# Altium PCB LPFADC.PcbDoc
Units mil, origin at the board's own origin, x right, y up, seen from the top; angles counter-clockwise.
Board outline 1805 x 1165 mil, 2 copper layers (Top Layer, Bottom Layer); 15 components, 13 nets, 54 pads, 9 vias.
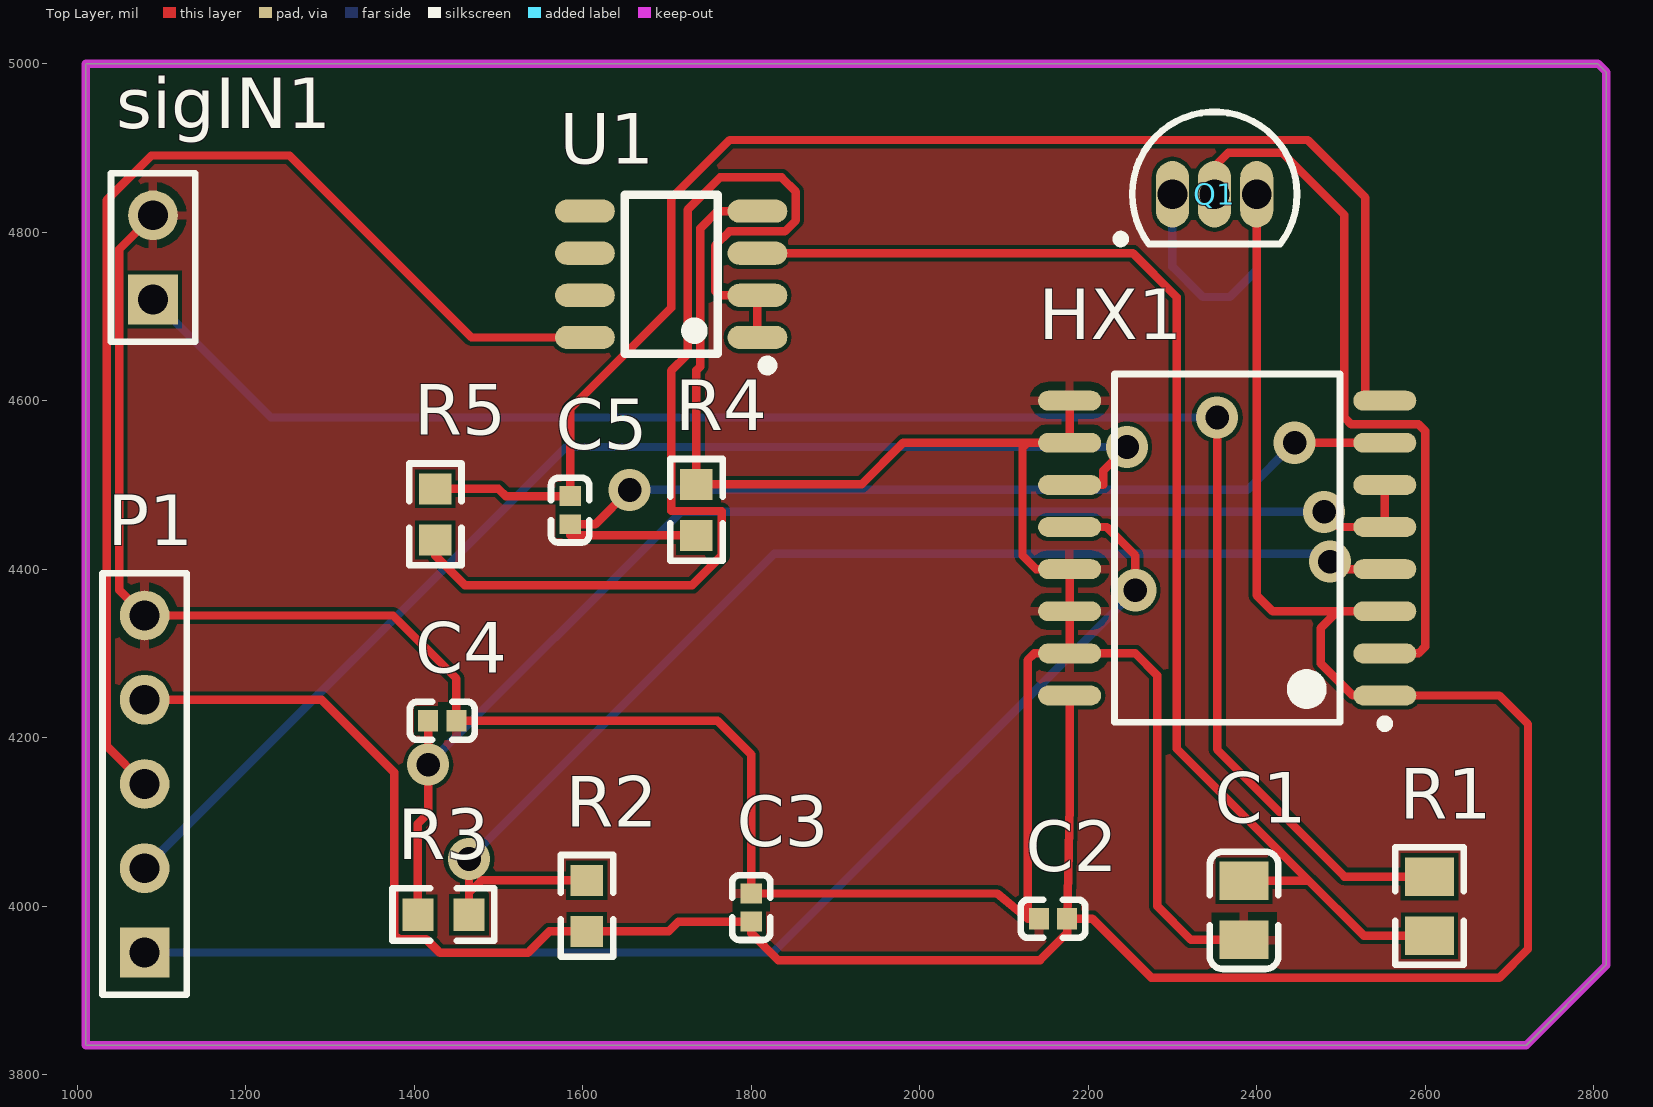
[diagram p0: Top Layer view]
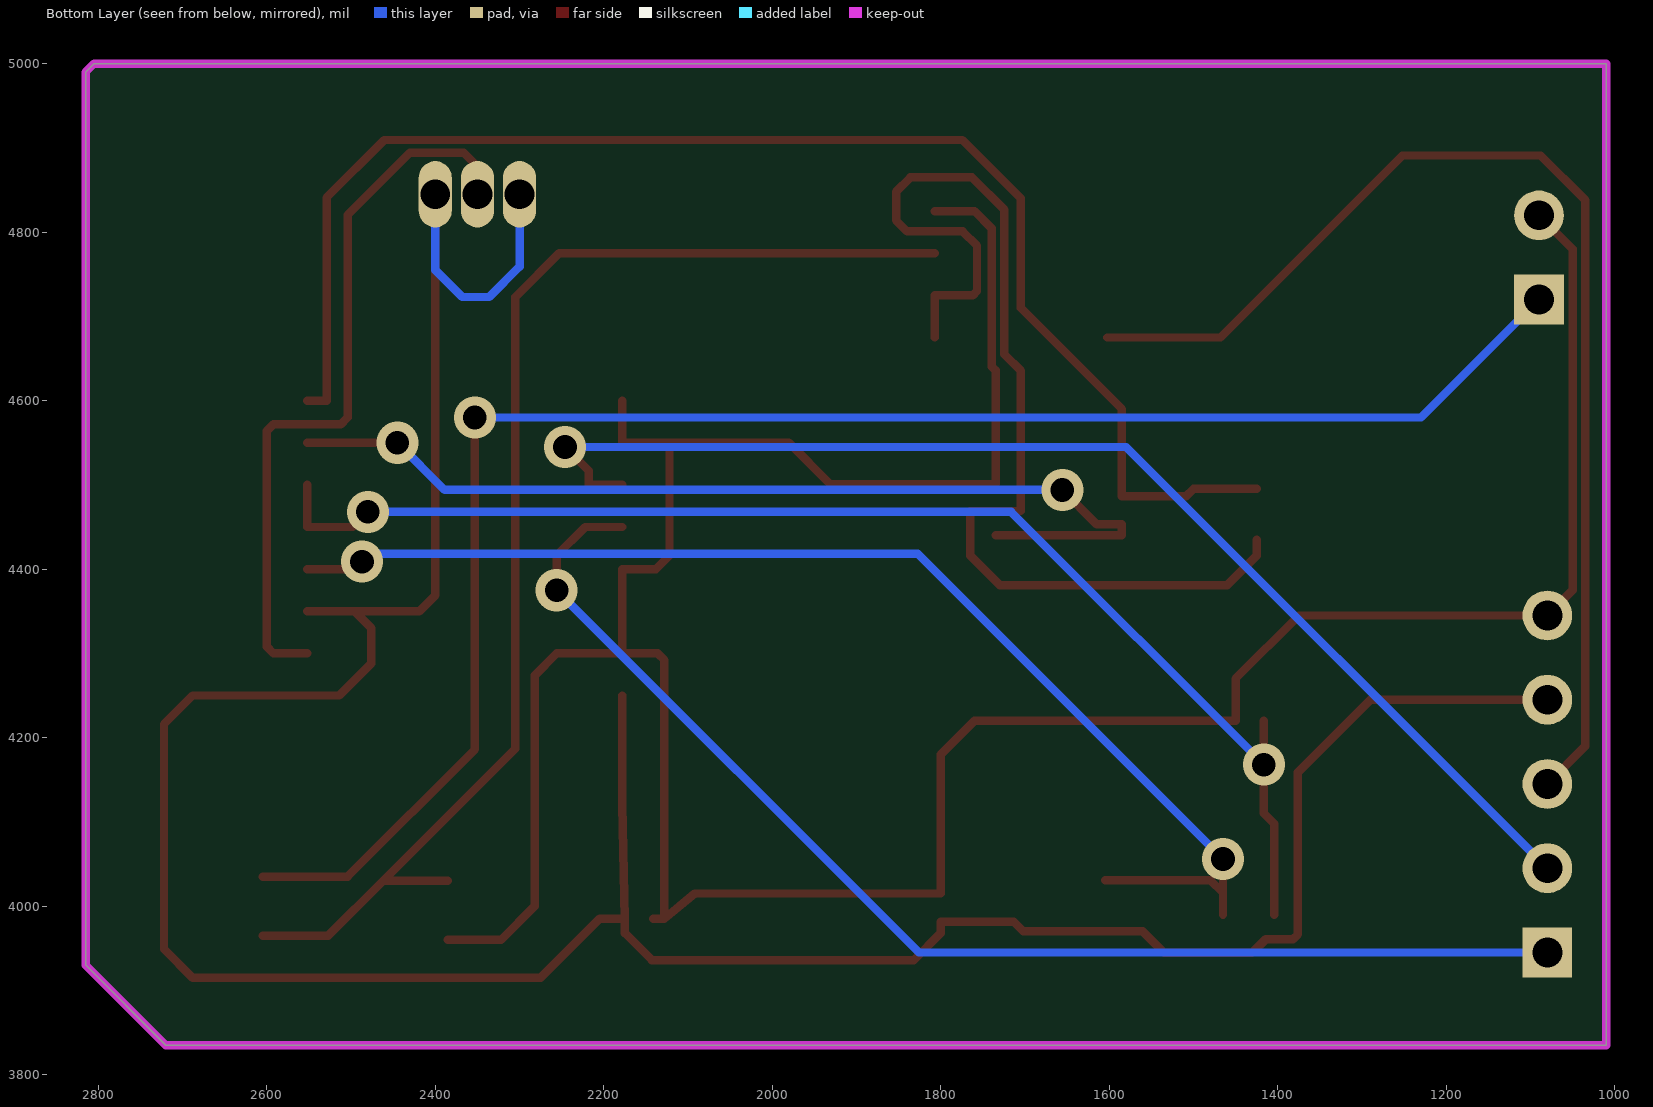
[diagram p1: Bottom Layer view, seen from below]
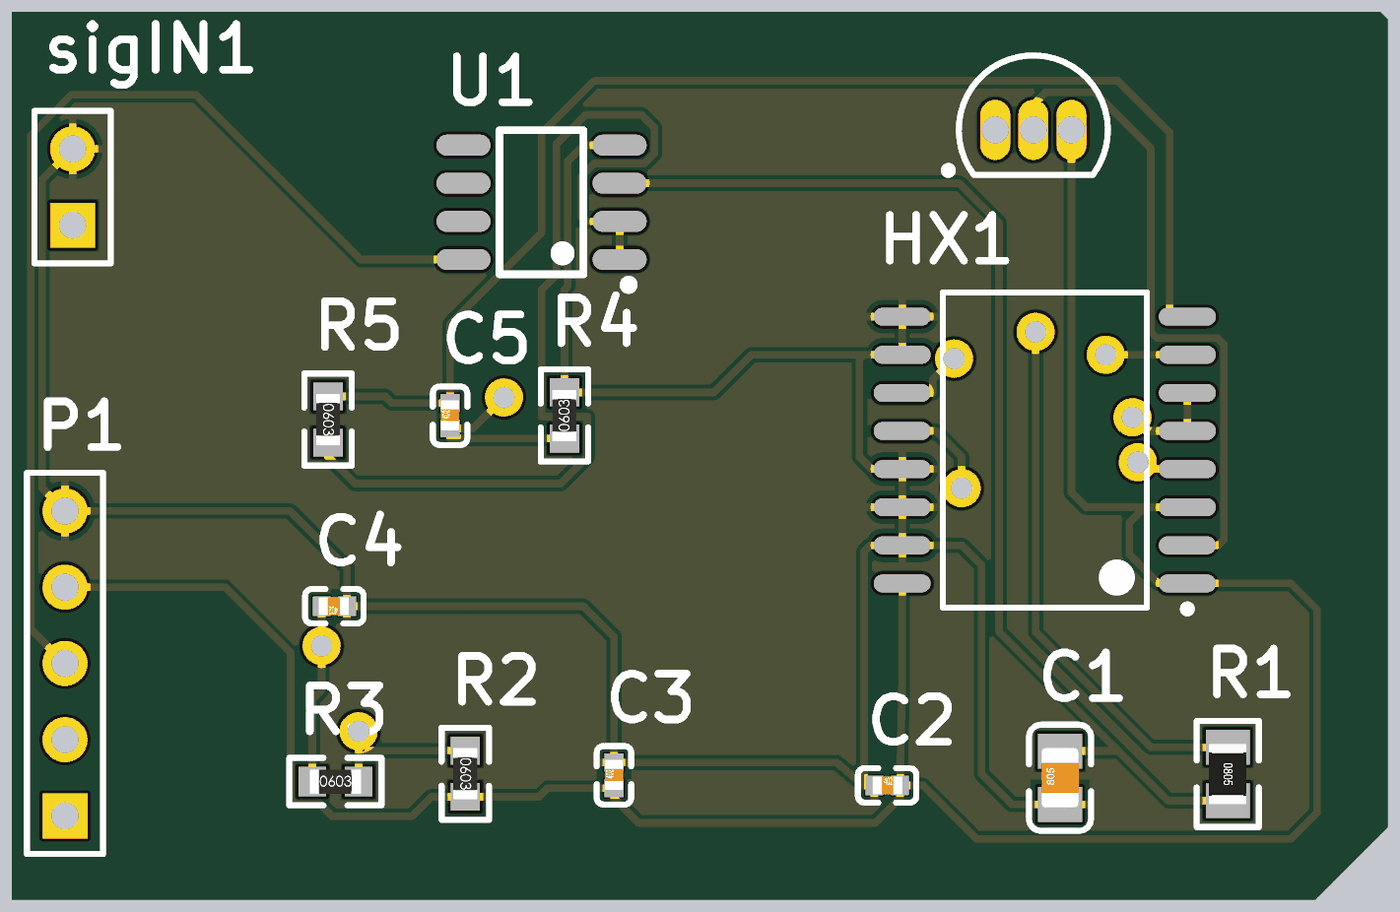
[diagram p2: 3D render of the assembled board from above, using the file's embedded part models]

## Layer stack, top to bottom
Top Solder: solder mask 0.4, Solder Resist, Dk 3.5
Top Layer: signal copper 1.4
Dielectric 1: dielectric 12.6, FR-4, Dk 4.8
Bottom Layer: signal copper 1.4
Bottom Solder: solder mask 0.4, Solder Resist, Dk 3.5

## Board outline
1010,3835 1010,5000 2805,5000 2815,4990 2815,3930 2720,3835

## Design rules (kind name [scope] priority, off if disabled: settings)
Clearance [All] p1: gap=5 ignorepadtopadclearanceinfootprint=FALSE
PolygonConnect [All] p1: connectstyle=Relief reliefconductorwidth=10 reliefentries=4 polygonreliefangle="90 Angle" airgapwidth=10
RoutingVias [All] p1: holewidth=28 width=50 viastyle="Through Hole" minholewidth=28 minwidth=50 maxholewidth=28 maxwidth=50
SolderMaskExpansion [All] p1: expansion=4
Width [All] p1: maxlimit=10 minlimit=10 preferedwidth=10
30 further rules are at their usual default settings.

## Components (designator, comment, footprint, x,y, rotation, side; value= is the part's Value field where it differs from the comment)
C1 "1uF (105) 10% 50V" 0805_C 2385,3995 r90 top
C2 "10uF (106) 20% 6.3V" 0402_C 2158.27,3985 r0 top
C3 "10uF (106) 20% 6.3V" 0402_C 1800,3998.27 r90 top
C4 "10uF (106) 20% 6.3V" 0402_C 1433.27,4220 r180 top
C5 "10uF (106) 20% 6.3V" 0402_C 1585,4470 r90 top
HX1 "hx711" HX711 2365,4425 r180 top
P1 "Header 5" HDR1X5 1080,3945 r90 top
Q1 "2N3906" TO-92A 2350,4845 r270 top
R1 "15.8k" 0805_R 2605,4000.04 r270 top
R2 "10KΩ (1002) ±1%" 0603_R 1605,4000.32 r270 top
R3 "10KΩ (1002) ±1%" 0603_R 1434.68,3990 r0 top
R4 "1KΩ (1002) ±1%" 0603_R 1735,4470.31 r90 top
R5 "1KΩ (1002) ±1%" 0603_R 1425,4465 r270 top
sigIN1 "Header 2" HDR1X2 1090,4720 r90 top
U1 "TL072CDT" SOIC-8_150mil 1705,4750 r90 top

## Footprints (in the part's own frame and the unit in brackets; to place one, negate y for a bottom-side part, rotate by r counter-clockwise, add the part's x,y. Pads: shape width x height; smd on the part's side, far side on the other; paste and mask are expansions set on the pad)
0402_C [mm]
  rect 0.6x0.65 smd mask+0.051: 1(-0.425,0) 2(0.425,0)
  silkscreen extent -0.97,-0.58 0.98,0.58, body extent -0.48,-0.3 0.52,0.3, height 0.2
0603_R [mm]
  rect 0.93x0.98 smd: 1(-0.77,0) 2(0.77,0)
  silkscreen extent -1.53,-0.79 1.54,0.79, body extent -0.85,-0.4 0.85,0.4, height 0.56
0805_C [mm]
  rect 1.16x1.47 smd: 1(-0.89,0) 2(0.89,0)
  silkscreen extent -1.77,-1.04 1.77,1.04, body extent -1,-0.62 1,0.63, height 0.77
0805_R [mm]
  rect 1.16x1.47 smd: 1(-0.89,0) 2(0.89,0)
  silkscreen extent -1.77,-1.03 1.77,1.03, body extent -1,-0.62 1,0.63, height 0.49
HDR1X2 [mm] "Connector; Header; 2 Position"
  rect 1.5x1.5 hole 0.9: 1(0,0)
  round 1.5 hole 0.9: 2(2.54,0)
  silkscreen extent -1.27,-1.27 3.81,1.27
HDR1X5 [mm] "Connector; Header; 5 Position"
  rect 1.5x1.5 hole 0.9: 1(0,0)
  round 1.5 hole 0.9: 2(2.54,0) 3(5.08,0) 4(7.62,0) 5(10.16,0)
  silkscreen extent -1.27,-1.27 11.43,1.27
HX711 [mm] "SOP, 16-Leads, Body 10.30x7.50mm, Pitch 1.27mm, IPC Medium Density"
  oval 1.9x0.6 smd: 1(-4.75,4.445) 2(-4.75,3.175) 3(-4.75,1.905) 4(-4.75,0.635) 5(-4.75,-0.635) 6(-4.75,-1.905) 7(-4.75,-3.175) 8(-4.75,-4.445) 9(4.75,-4.445) 10(4.75,-3.175) 11(4.75,-1.905) 12(4.75,-0.635) 13(4.75,0.635) 14(4.75,1.905) 15(4.75,3.175) 16(4.75,4.445)
  silkscreen extent -4.88,-5.25 3.4,5.42, body extent -3.8,-5.25 3.8,5.25, height 2.65
SOIC-8_150mil [mm]
  oval 0.7x1.8 smd: 1(-1.905,-2.6) 2(-0.635,-2.6) 3(0.635,-2.6) 4(1.905,-2.6) 5(1.905,2.6) 6(0.635,2.6) 7(-0.635,2.6) 8(-1.905,2.6)
  silkscreen extent -2.9,-3.05 2.4,1.4
TO-92A [mm] "TO, Flat Index; 3 In-Line, Axial Leads; Body Dia. 4.5mm; Leads 0.51 x 0.48 mm (max)"
  oval 2x1 hole 0.9: 1(0,-1.27) 2(0,0) 3(0,1.27)
  silkscreen extent -2.48,-2.95 1.5,2.48, body extent -2.48,-2.5 1.5,2.5, height 6.86

## Part data
C1: library part "0805 1uF (105) 10% 50V", "贴片电容", Package=0805, SuppliersPartNumber=C28323, ComponentLink1Description=供应商链接, ComponentLink1URL=http://www.szlcsc.com/product/details_29074.html, Supplier=LC
C2 C3 C4 C5: library part "0402 10uF (106) 20% 6.3V", "贴片电容", Package=0402, SuppliersPartNumber=C15525, ComponentLink1Description=供应商链接, ComponentLink1URL=http://www.szlcsc.com/product/details_16204.html, Supplier=LC
P1: "Header, 5-Pin", LatestRevisionDate=17-Jul-2002, LatestRevisionNote="Re-released for DXP Platform.", Publisher="Altium Limited"
Q1: "PNP General Purpose Amplifier", ComponentLink1Description="Manufacturer Link", ComponentLink1URL=http://www.fairchildsemi.com/, ComponentLink2Description=Datasheet, ComponentLink2URL=http://www.fairchildsemi.com/ds/2N%2F2N3906.pdf, DatasheetVersion=1997, LatestRevisionDate=15-Jan-2003, LatestRevisionNote="PCB Footprint 'BCY-W3/D4.7' replaced", PackageDescription="TO, Flat Index; 3 In-Line, Axial Leads; Body Dia. 4.5mm; Leads 0.51 x 0.48 mm (max)", PackageReference=TO-92A, PackageVersion=Sep-1998, Published=8-Jun-2000, Publisher="Altium Limited"
R1: library part "0805 330KΩ (3303) 1%", "贴片电阻", Package=0805, SuppliersPartNumber=C17629, ComponentLink1Description=供应商链接, ComponentLink1URL=http://www.szlcsc.com/product/details_18317.html, Supplier=LC
R2 R3 R4 R5: library part "0603 10KΩ (1002) 1%", "贴片电阻", Package=0603, SuppliersPartNumber=C25804, ComponentLink1Description=供应商链接, ComponentLink1URL=http://www.szlcsc.com/product/details_26547.html, Supplier=LC
sigIN1: "Header, 2-Pin", LatestRevisionDate=17-Jul-2002, LatestRevisionNote="Re-released for DXP Platform.", Publisher="Altium Limited"
U1: library part TL072CDT_[C6961], "运放", Package=SOIC-8_150mil, SuppliersPartNumber=C6961, ComponentLink1Description=供应商链接, ComponentLink1URL=http://www.szlcsc.com/product/details_7433.html, Supplier=LC

## Via types
v1: diameter 50, hole 28, Top Layer to Bottom Layer, 9 vias

## Nets (pads, with @x,y where several pads share a name; then routed paths per layer and width w, separated by ;. In a path a pad name is that pad's centre, name@x,y a point inside that pad or via, vN(x,y) a via of type N, cw(c..) or ccw(c..) an arc to the next point about the centre after c; other vN are vias at no path point)
+3V3: C2.2 C3.1 HX1.1 HX1.3 HX1.16 P1.4 Q1.1 Q1.3 R2.2 | length 3812.8
  Top Layer w10: P1.4 1290,4245 1376.06,4158.94 1376.06,3966.57 1381.92,3960.71 1414.29,3960.71 1430.29,3944.71 1535,3944.71 1560.29,3970 R2.2 1702,3970 1713.54,3981.54 C3.1 1800,3968 1832,3936 2143,3936 2175,3968 C2.2 ; HX1.16 2177.99,4119.99 C2.2 ; Q1.3 2400,4368.79 2418.79,4350 2496,4350 ; HX1.3 2496,4350 ; C2.2 2205,3985 2275,3915 2688,3915 2722,3949 2722,4216 2688,4250 HX1.1 2514,4250 2476,4288 2476,4330 2496,4350
  Bottom Layer w10: Q1.1 2300,4759 2336,4723 2368,4723 2400,4755 Q1.3
+5V: P1.3 U1.8 | length 1390.7
  Top Layer w10: P1.3 1035,4190 1035,4838 1088,4891 1252,4891 1468,4675 U1.8
GND: C1.1 C2.1 C3.2 C4.1 HX1.9 HX1.10 HX1.13 HX1.14 HX1.15 P1.5 R4.2 sigIN1.2 U1.4 | length 3902.3
  Top Layer w10: sigIN1.2 1050,4780 1050,4375 P1.5 1375,4345 1450,4270 C4.1 1760,4220 1800,4180 C3.2 2092,4015 2128,3985 ; U1.4 1760,4825 1739.5,4804.5 1739.5,4640.36 1735,4635.86 R4.2 1931,4500.63 1980.37,4550 2128,4550 ; C2.1 2128,3985 ; HX1.9 HX1.10 2128,4550 ; C1.1 2322.04,3959.96 2282,4000 2282,4274 2256,4300 HX1.15 ; 2128,3985 2128,4292 2136,4300 HX1.15 ; 2128,4550 2122,4544 2122,4416 2138,4400 HX1.13 HX1.14 HX1.15
NetC1_2: C1.2 R1.2 U1.3 | length 1524.1
  Top Layer w10: U1.3 2253,4775 2305,4723 2305,4187 2461.96,4030.04 C1.2 ; 2462,4030.04 2527.04,3965 R1.2
NetC4_2: C4.2 HX1.5 HX1.6 R3.1 | length 1552.2
  Top Layer w10: R3.1 1404.37,4098 1416.54,4110.17 v1(1416.54,4168) C4.2 ; v1(2480,4468) 2498,4450 HX1.5 HX1.6
  Bottom Layer w10: v1(1416.54,4168) 1716.54,4468 v1(2480,4468)
NetC5_1: C5.1 HX1.7 R4.1 | length 1170.3
  Top Layer w10: v1(1655.73,4494) 1615,4453.27 C5.1 1585,4440 R4.1 ; v1(2445,4550) HX1.7
  Bottom Layer w10: v1(1655.73,4494) 2389,4494 v1(2445,4550)
NetC5_2: C5.2 HX1.8 R5.1 | length 1711.6
  Top Layer w10: R5.1 1500,4495.31 1508.58,4486.73 C5.2 1585,4590 1705,4710 1705,4840 1774.37,4909.37 2460.63,4909.37 2529,4841 2529,4600 HX1.8
NetHX1_2: HX1.2 Q1.2 | length 874.7
  Top Layer w10: Q1.2 2350,4878 2366.37,4894.37 2430,4894.37 2504,4820.37 2504,4580 2512,4572 2592,4572 2600,4564 2600,4308 2592,4300 HX1.2
NetHX1_4: HX1.4 R2.1 R3.2 | length 1456.8
  Top Layer w10: R3.2 1465,4016 ; v1(1465,4056) 1465,4016 ; R2.1 1479.63,4030.63 1465,4016 ; v1(2487,4409) 2496,4400 HX1.4
  Bottom Layer w10: v1(1465,4056) 1827.4,4418.4 2477.6,4418.4 v1(2487,4409)
NetHX1_11: HX1.11 P1.2 | length 1469.7
  Top Layer w10: HX1.11 2218,4500 2218,4517 v1(2246,4545)
  Bottom Layer w10: P1.2 1580,4545 v1(2246,4545)
NetHX1_12: HX1.12 P1.1 | length 1487.2
  Top Layer w10: HX1.12 2222,4450 2256,4416 v1(2256,4375)
  Bottom Layer w10: P1.1 1826,3945 v1(2256,4375)
NetR1_1: R1.1 sigIN1.1 | length 2029.5
  Top Layer w10: v1(2353,4580) 2353,4186.08 2504,4035.08 R1.1
  Bottom Layer w10: sigIN1.1 1230,4580 v1(2353,4580)
Sigo: R5.2 U1.1 U1.2 | length 1316.7
  Top Layer w10: R5.2 1425,4416 1460,4381 1730,4381 1765,4416 1765,4469 1705,4469 1705,4635.5 1724.5,4655 1724.5,4826.59 1762.91,4865 1836,4865 1853,4848 1853,4814 1840,4801 1774,4801 1757,4784 1757,4730 1762,4725 U1.2 U1.1
pads on no net: U1.5 U1.6 U1.7

## Polygon pours and split planes (outlines as drawn)
no net on Drill Drawing (solid, remove dead copper): 1010,5000 2805,5000 2815,4990
GND on Top Layer (solid, remove dead copper, pour order 0): 1010,5000 2805,5000 2815,4990 2815,3930 2720,3835 1010,3835

## Keep-outs
Keep-Out Layer:
  the board outline again, w10